# EAGLE board Proiect_TSC_PCB (EAGLE 9.7.0)
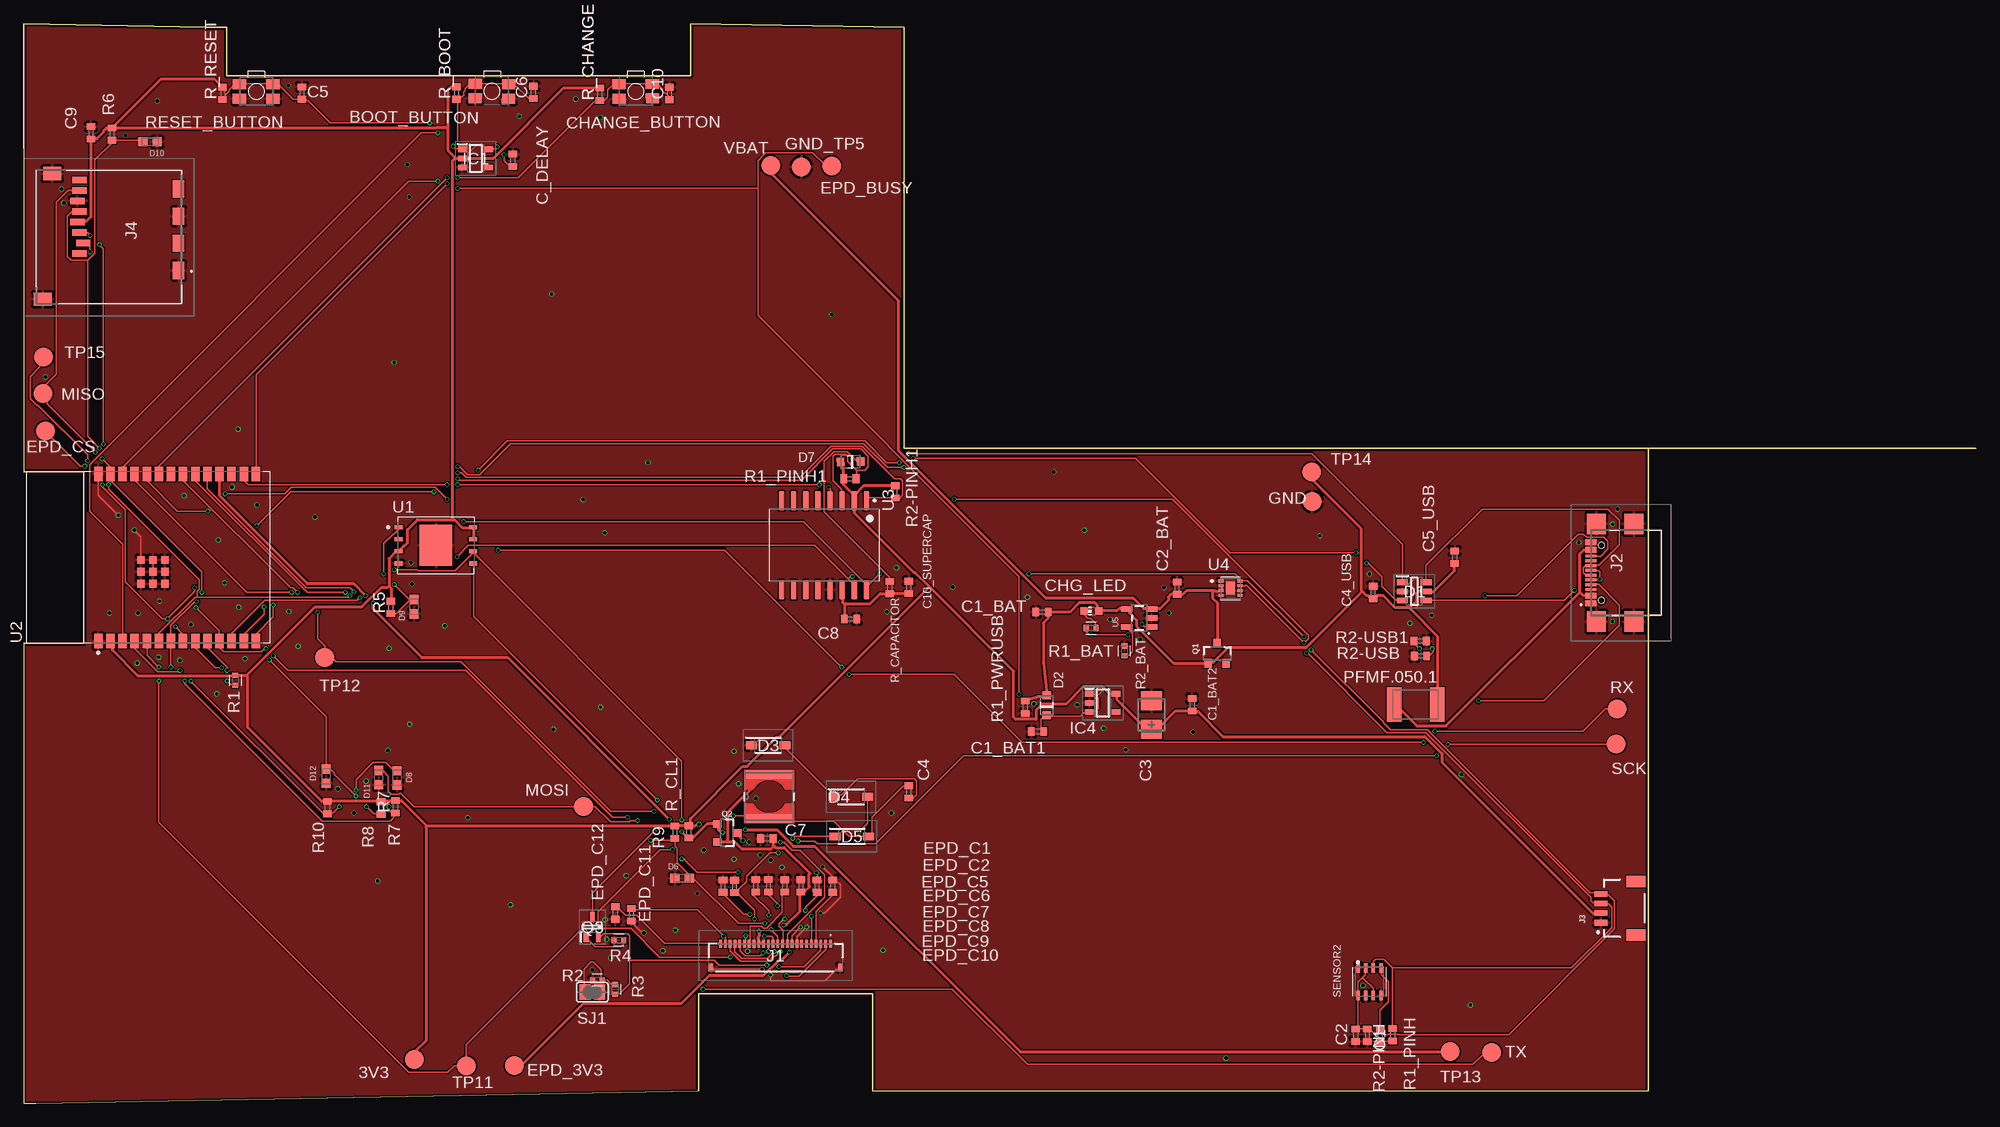
[diagram p0: board, top side]
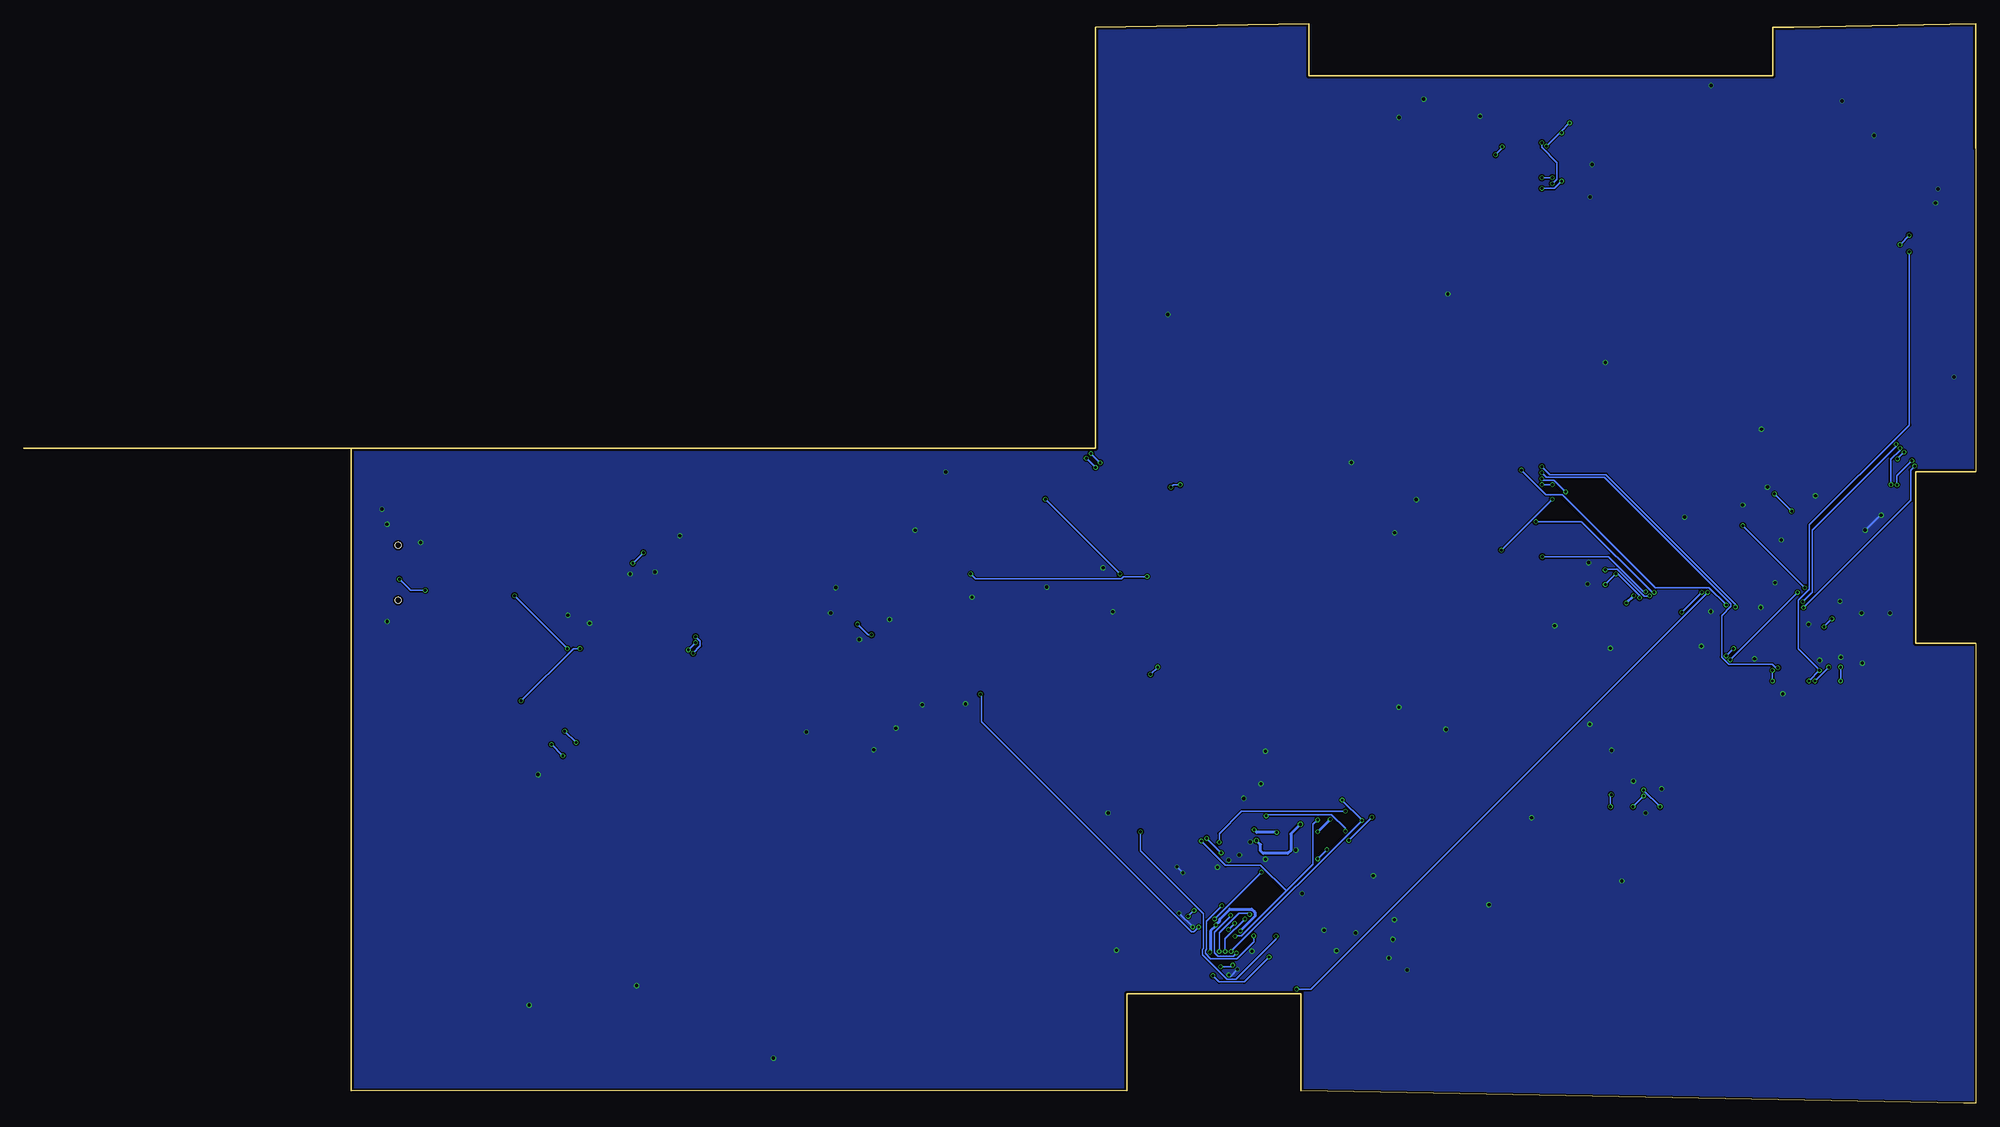
[diagram p1: board, bottom side, seen from below]

Size 204.47 x 113.03 mm. Coordinates in mm from the lower left corner, seen from the top.
Outline: 170.18,68.58 92.2,68.58 92.2,112.7 69.85,113.03 69.85,107.62 21.23,107.62 21.23,112.7 19.05,112.7 0,113.03 0,100 0,66.14 6.28,66.14 6.28,48.16 0,48.16 0,0 1.27,0 70.68,1.27 70.68,11.43 88.9,11.43 88.9,1.27 170.16,1.27 170.18,68.58
Outline: 170.18,68.58 204.47,68.58
Copper layers (1*16): Top 0.035mm / dielectric 1.6mm / Bottom 0.035mm
Design rules "jlcpcb-2layers.dru *": minimum track width 0.15mm, minimum drill 0.3mm, track to track 5mil, track to pad 5mil, pad to pad 5mil, via to via 5mil, smd to smd 5mil, copper to edge 0.2mm, drill to drill 6mil, minimum pad ring 10mil, minimum via ring 3mil, stop-mask expansion 4mil, vias tented up to drill 0mil, thermal gap 10mil
Net classes: 1 POWER: width 0.3 mm

## Footprints (pad centres in the part's own frame; a part is rotated, then mirrored left to right if it is on the bottom)
TP20R = smd 2 x 2: TP 0,0
MYBUTTON = smd 1.4 x 1.05: 1 1.75,0.75; 2 -1.75,0.75; 3 -1.75,-0.75; 4 1.75,-0.75
ESP32_WROVER_EAGLE-LTSPICE_C0402 = smd 0.7 x 0.9: 1 -0.65,0; 2 0.65,0
RCL_CT3528 = smd 2 x 2.2: + -1.5,0; - 1.5,0
EAGLE-LTSPICE_C0402 = smd 0.7 x 0.9: 1 -0.65,0; 2 0.65,0
ADAFRUIT_CHIP-LED0603 = smd 0.8 x 0.8: A 0,-0.75; C 0,0.75
SOT95P280X145-6N = smd 1.2 x 0.6: 1 -1.25,0.95; 2 -1.25,0; 3 -1.25,-0.95; 4 1.25,-0.95; 5 1.25,0; 6 1.25,0.95
ESP32_WROVER_AVX---SD0805S020S1R0_AVX_SD0805S020S1R0_0 = smd 0.8 x 0.9: 1 -1.05,0; 2 1.05,0
SOD3716X135N = smd 1.15 x 0.8: 1 -1.75,0; 2 1.75,0
DIOC1608X36N = smd 0.97 x 0.94: 1 -0.75,0; 2 0.75,0
SOT95P280X125-5N = smd 0.9 x 0.6: 1 -1.4,0.95; 2 -1.4,0; 3 -1.4,-0.95; 4 1.4,-0.95; 5 1.4,0.95
SOT95P280X120-5N = smd 0.9 x 0.6: 1 -1.4,0.95; 2 -1.4,0; 3 -1.4,-0.95; 4 1.4,-0.95; 5 1.4,0.95
FH34SRJ24S05SH99 = smd 0.3 x 0.8: 1 5.75,1.45; 2 5.25,1.45; 3 4.75,1.45; 4 4.25,1.45; 5 3.75,1.45; 6 3.25,1.45; 7 2.75,1.45; 8 2.25,1.45; 9 1.75,1.45; 10 1.25,1.45; 11 0.75,1.45; 12 0.25,1.45; 13 -0.25,1.45; 14 -0.75,1.45; 15 -1.25,1.45; 16 -1.75,1.45; 17 -2.25,1.45; 18 -2.75,1.45; 19 -3.25,1.45; 20 -3.75,1.45; 21 -4.25,1.45; 22 -4.75,1.45; 23 -5.25,1.45; 24 -5.75,1.45 | smd 0.4 x 0.8: MP1 6.75,-1.05; MP2 -6.75,-1.05
SAMACSYS_PARTS_USB4110GFA = smd 0.3 x 1.15: A1 -3.35,3.678; A4 -2.55,3.678; A5 -1.25,3.678; A6 -0.25,3.678; A7 0.25,3.678; A8 1.25,3.678; A9 2.55,3.678; A12 3.35,3.678; B1 3.05,3.678; B4 2.25,3.678; B5 1.75,3.678; B6 0.75,3.678; B7 -0.75,3.678; B8 -1.75,3.678; B9 -2.25,3.678; B12 -3.05,3.678 | smd 2.18 x 2: MP1 -5.11,-0.827; MP2 5.11,-0.827; MP3 -5.11,3.103; MP4 5.11,3.103 | hole 0.65: -2.89,2.603; 2.89,2.603
JST04_1MM_RA = smd 0.6 x 1.35: 1 -1.5,0; 2 -0.5,0; 3 0.5,0; 4 1.5,0 | smd 1.2 x 2: NC1 2.8,-3.675; NC2 -2.8,-3.675
112ATAARR03ATTEND = smd 1.8 x 1.2: G1 10.6,10.4; G2 4.9,10.4; S1 7.75,10.4; S2 2.05,10.4 | smd 1.4 x 1.9: G3 13.6,-3.85; G4 0.45,-2.85 | smd 0.7 x 1.5: P1 8.8,0; P2 7.7,0.4; P3 6.6,0; P4 5.5,-0.2; P5 4.4,0; P6 3.3,-0.2; P7 2.2,0; P8 1.1,0
IND_4828-WE-TPC_WRE = smd 0.889 x 4.826: 1 -2.286,0; 2 2.286,0
ESP32C6_VARISTOR_CT/CN1812 = smd 1.5 x 3.6: 1 -2.25,0; 2 2.25,0
ESP32_WROVER_SPARKFUN-DISCRETESEMI_SOT23-3 = smd 0.8 x 0.9: 1 -0.95,-1; 2 0.95,-1; 3 0,1.1
SOT65P210X110-3N = smd 1.05 x 0.5: 1 -1.05,0.65; 2 -1.05,-0.65; 3 1.05,0
RESC1005X40 = smd 0.535 x 0.644: 1 -0.507,0; 2 0.507,0
ESP32_WROVER_EAGLE-LTSPICE_R0402 = smd 0.7 x 0.9: 1 -0.65,0; 2 0.65,0
ESP32_WROVER_BME680_PSON80P300X300X100-8N = smd 1.016 x 0.5: 1 1.458,1.2; 2 1.458,0.4; 3 1.458,-0.4; 4 1.458,-1.2; 5 -1.458,-1.22; 6 -1.458,-0.4; 7 -1.458,0.4; 8 -1.458,1.2
SJ = smd 1.168 x 1.6: 1 -0.762,0; 2 0.762,0
SON127P600X800X80-9N = smd 0.94 x 0.44: 1 -3.895,1.905; 2 -3.895,0.635; 3 -3.895,-0.635; 4 -3.895,-1.905; 5 3.895,-1.905; 6 3.895,-0.635; 7 3.895,0.635; 8 3.895,1.905 | smd 3.4 x 4.3: 9 0,0
XCVR_ESP32-C6-WROOM-1-N8 = smd 1.5 x 0.9: 1 -8.75,5.26; 2 -8.75,3.99; 3 -8.75,2.72; 4 -8.75,1.45; 5 -8.75,0.18; 6 -8.75,-1.09; 7 -8.75,-2.36; 8 -8.75,-3.63; 9 -8.75,-4.9; 10 -8.75,-6.17; 11 -8.75,-7.44; 12 -8.75,-8.71; 13 -8.75,-9.98; 14 -8.75,-11.25; 15 8.75,-11.25; 16 8.75,-9.98; 17 8.75,-8.71; 18 8.75,-7.44; 19 8.75,-6.17; 20 8.75,-4.9; 21 8.75,-3.63; 22 8.75,-2.36; 23 8.75,-1.09; 24 8.75,0.18; 25 8.75,1.45; 26 8.75,2.72; 27 8.75,3.99; 28 8.75,5.26 | smd 0.8 x 0.8: 29_1 -2.755,0.79; 29_2 -1.505,0.79; 29_3 -0.255,0.79; 29_4 -2.755,-0.46; 29_5 -1.505,-0.46; 29_6 -0.255,-0.46; 29_7 -2.755,-1.71; 29_8 -1.505,-1.71; 29_9 -0.255,-1.71
SOIC127P1032X265-16N = smd 2.05 x 0.59: 1 -4.655,4.445; 2 -4.655,3.175; 3 -4.655,1.905; 4 -4.655,0.635; 5 -4.655,-0.635; 6 -4.655,-1.905; 7 -4.655,-3.175; 8 -4.655,-4.445; 9 4.655,-4.445; 10 4.655,-3.175; 11 4.655,-1.905; 12 4.655,-0.635; 13 4.655,0.635; 14 4.655,1.905; 15 4.655,3.175; 16 4.655,4.445
SON50P200X200X80-9N = smd 0.61 x 0.305: 1 -0.985,0.75; 2 -0.985,0.25; 3 -0.985,-0.25; 4 -0.985,-0.75; 5 0.985,-0.75; 6 0.985,-0.25; 7 0.985,0.25; 8 0.985,0.75 | smd 0.9 x 1.3: 9 0,0
ESP32_WROVER_SPARKFUN-IC-POWER_SOT23-5 = smd 0.55 x 1.2: 1 -0.95,-1.3; 2 0,-1.3; 3 0.95,-1.3; 4 0.95,1.3; 5 -0.95,1.3

## Placement (x,y rotation side)
3V3  TPTP20R  [TP20R]  40.89,4.58 0 top
BOOT_BUTTON  BUTTON_CUSYOMV1  [MYBUTTON]  49.04,105.97 179.5 top
C1  100nF  [ESP32_WROVER_EAGLE-LTSPICE_C0402]  140.74,7.11 270 top
C1_BAT  4.7uF  [ESP32_WROVER_EAGLE-LTSPICE_C0402]  106.67,51.41 180 top
C1_BAT1  4.7uF  [ESP32_WROVER_EAGLE-LTSPICE_C0402]  106.19,38.91 180 top
C1_BAT2  4.7uF  [ESP32_WROVER_EAGLE-LTSPICE_C0402]  122.39,41.72 90 top
C2  100nF  [ESP32_WROVER_EAGLE-LTSPICE_C0402]  139.52,7.09 270 top
C2_BAT  4.7uF  [ESP32_WROVER_EAGLE-LTSPICE_C0402]  120.81,53.94 90 top
C3  100uF TANT  [RCL_CT3528]  118.11,40.64 90 top
C4  4.7uF/25V  [ESP32_WROVER_EAGLE-LTSPICE_C0402]  92.7,32.59 90 top
C4_USB  100nF  [ESP32_WROVER_EAGLE-LTSPICE_C0402]  141.34,53.48 90 top
C5  1uF  [EAGLE-LTSPICE_C0402]  29.13,105.78 90 top
C5_USB  4.7uF  [ESP32_WROVER_EAGLE-LTSPICE_C0402]  149.89,57.18 90 top
C6  100nF  [ESP32_WROVER_EAGLE-LTSPICE_C0402]  53.39,105.86 90 top
C7  10uF  [ESP32_WROVER_EAGLE-LTSPICE_C0402]  77.84,27.7 180 top
C8  100nF  [EAGLE-LTSPICE_C0402]  86.6,50.68 0 top
C9  100nF  [ESP32_WROVER_EAGLE-LTSPICE_C0402]  7.03,101.62 90 top
C10  100nF  [ESP32_WROVER_EAGLE-LTSPICE_C0402]  67.64,105.74 90 top
C10_SUPERCAP  CPH3225A  [EAGLE-LTSPICE_C0402]  92.71,54.01 90 top
C_DELAY  100nF  [ESP32_WROVER_EAGLE-LTSPICE_C0402]  51.23,98.74 90 top
CHANGE_BUTTON  BUTTON_CUSYOMV1  [MYBUTTON]  64.11,105.97 180.4 top
CHG_LED  [ADAFRUIT_CHIP-LED0603]  111.84,51.52 90 top
D1  USBLC6-2SC6Y  [SOT95P280X145-6N]  145.67,53.59 0 top
D2  ESP32_WROVER_AVX---SD0805S020S1R0_AVX_SD0805S020S1R0_0_0AVX_SD0805S020S1R0_0_0  [ESP32_WROVER_AVX---SD0805S020S1R0_AVX_SD0805S020S1R0_0]  107.16,41.66 90 top
D3  MBR0530  [SOD3716X135N]  77.97,37.48 0 top
D4  MBR0530  [SOD3716X135N]  86.65,32.09 0 top
D5  MBR0530  [SOD3716X135N]  86.74,27.93 0 top
D6  PGB1010603MR  [DIOC1608X36N]  68.95,23.53 0 top
D7  ESP32_WROVER_AVX---SD0805S020S1R0_AVX_SD0805S020S1R0_0_0AVX_SD0805S020S1R0_0_0  [ESP32_WROVER_AVX---SD0805S020S1R0_AVX_SD0805S020S1R0_0]  86.61,67.16 181.4 top
D8  PGB1010603MR  [DIOC1608X36N]  39.12,34.06 90 top
D9  PGB1010603MR  [DIOC1608X36N]  40.86,51.98 90 top
D10  PGB1010603MR  [DIOC1608X36N]  13.22,100.68 180 top
D11  PGB1010603MR  [DIOC1608X36N]  37.19,34.08 90 top
D12  PGB1010603MR  [DIOC1608X36N]  31.68,34.25 90 top
EPD_3V3  TPTP20R  [TP20R]  51.38,3.93 0 top
EPD_BUSY  TPTP20R  [TP20R]  84.63,98.14 0 top
EPD_C1  1uF/50V  [ESP32_WROVER_EAGLE-LTSPICE_C0402]  84.73,22.72 270 top
EPD_C2  1uF/50V  [ESP32_WROVER_EAGLE-LTSPICE_C0402]  83.09,22.73 270.4 top
EPD_C5  0.1uF/50V  [ESP32_WROVER_EAGLE-LTSPICE_C0402]  81.41,22.74 270 top
EPD_C6  1uF/50V  [ESP32_WROVER_EAGLE-LTSPICE_C0402]  79.71,22.75 270 top
EPD_C7  1uF/50V  [ESP32_WROVER_EAGLE-LTSPICE_C0402]  78.01,22.77 270 top
EPD_C8  1uF/50V  [ESP32_WROVER_EAGLE-LTSPICE_C0402]  76.67,22.77 270 top
EPD_C9  1uF/50V  [ESP32_WROVER_EAGLE-LTSPICE_C0402]  74.45,22.69 270 top
EPD_C10  1uF/50V  [ESP32_WROVER_EAGLE-LTSPICE_C0402]  73.25,22.72 270 top
EPD_C11  1uF/50V  [ESP32_WROVER_EAGLE-LTSPICE_C0402]  63.66,19.73 90 top
EPD_C12  1uF/50F  [ESP32_WROVER_EAGLE-LTSPICE_C0402]  61.95,19.91 90 top
EPD_CS  TPTP20R  [TP20R]  2.25,70.41 0 top
GND  TPTP20R  [TP20R]  134.94,63 0 top
GND_TP5  TPTP20R  [TP20R]  81.47,98.06 0 top
IC1  BD5229G-TR  [SOT95P280X125-5N]  47.34,98.94 0 top
IC4  XC6220A331MR-G  [SOT95P280X120-5N]  113.03,41.91 0 top
J1  FH34SRJ-24S-0.5SH_99_  [FH34SRJ24S05SH99]  78.74,15.24 0 top
J2  SAMACSYS_PARTS_USB4110-GF-A  [SAMACSYS_PARTS_USB4110GFA]  167.85,55.54 90 top
J3  QWIIC_RIGHT_ANGLE  [JST04_1MM_RA]  165.21,20.4 90 top
J4  112A-TAAR-R03_ATTEND  [112ATAARR03ATTEND]  5.82,97.79 270 top
L1  68uH  [IND_4828-WE-TPC_WRE]  78.08,32.1 90 top
MISO  TPTP20R  [TP20R]  2.02,74.32 0 top
MOSI  TPTP20R  [TP20R]  58.64,31.05 0 top
PFMF.050.1  ESP32C6_VARISTORCN1812  [ESP32C6_VARISTOR_CT/CN1812]  145.8,41.73 0 top
Q1  20V/4.2A/52mΩ/1.4W  [ESP32_WROVER_SPARKFUN-DISCRETESEMI_SOT23-3]  125.02,47.06 0 top
Q2  20V/4.2A/52mΩ/1.4W  [ESP32_WROVER_SPARKFUN-DISCRETESEMI_SOT23-3]  73.65,28.3 270 top
Q3  SI1308EDL-T1-GE3  [SOT65P210X110-3N]  59.54,18.44 90 top
R1  100K  [RESC1005X40]  22.15,44.28 90 top
R1_BAT  200  [RESC1005X40]  111.81,49.76 180 top
R1_PINH  10K  [ESP32_WROVER_EAGLE-LTSPICE_R0402]  143.38,7.15 270 top
R1_PINH1  10K  [ESP32_WROVER_EAGLE-LTSPICE_R0402]  86.53,65.39 180 top
R1_PWRUSB  100K  [ESP32_WROVER_EAGLE-LTSPICE_R0402]  104.89,41.46 90 top
R2  2.2  [RESC1005X40]  60.07,12.87 0 top
R2-PINH  10K  [ESP32_WROVER_EAGLE-LTSPICE_R0402]  142.09,7.11 270 top
R2-PINH1  10K  [ESP32_WROVER_EAGLE-LTSPICE_R0402]  91.28,64.01 90 top
R2-USB  5K1  [ESP32_WROVER_EAGLE-LTSPICE_R0402]  146.32,46.82 180 top
R2-USB1  5K1  [ESP32_WROVER_EAGLE-LTSPICE_R0402]  146.27,48.39 180 top
R2_BAT  2K  [RESC1005X40]  115.32,47.36 270 top
R3  0.47  [RESC1005X40]  61.94,11.91 269.4 top
R4  100k  [RESC1005X40]  62.32,17.06 0 top
R5  10K  [ESP32_WROVER_EAGLE-LTSPICE_R0402]  38.46,51.91 90 top
R6  10K  [ESP32_WROVER_EAGLE-LTSPICE_R0402]  9.23,101.49 90 top
R7  10K  [ESP32_WROVER_EAGLE-LTSPICE_R0402]  38.94,31.05 90 top
R8  10K  [ESP32_WROVER_EAGLE-LTSPICE_R0402]  37.43,30.9 90 top
R9  10K  [ESP32_WROVER_EAGLE-LTSPICE_R0402]  68.21,28.37 90 top
R10  10K  [ESP32_WROVER_EAGLE-LTSPICE_R0402]  31.81,30.95 90 top
R_BOOT  10K  [ESP32_WROVER_EAGLE-LTSPICE_R0402]  45.33,105.79 90 top
R_CAPACITOR  15  [ESP32_WROVER_EAGLE-LTSPICE_R0402]  90.72,53.99 270 top
R_CHANGE  10K  [ESP32_WROVER_EAGLE-LTSPICE_R0402]  60.34,105.65 90 top
R_CL1  10K  [ESP32_WROVER_EAGLE-LTSPICE_R0402]  69.67,28.4 90 top
R_RESET  10K  [ESP32_WROVER_EAGLE-LTSPICE_R0402]  20.82,105.75 90 top
RESET_BUTTON  BUTTON_CUSYOMV1  [MYBUTTON]  24.34,105.94 180 top
RX  TPTP20R  [TP20R]  166.92,41.29 0 top
SCK  TPTP20R  [TP20R]  166.81,37.58 0 top
SENSOR2  ESP32_WROVER_BME680_BME680  [ESP32_WROVER_BME680_PSON80P300X300X100-8N]  140.97,12.7 90 top
SJ1  [SJ]  59.54,11.62 180 top
TP11  TPTP20R  [TP20R]  46.36,3.9 0 top
TP12  TPTP20R  [TP20R]  31.51,46.67 0 top
TP13  TPTP20R  [TP20R]  149.44,5.4 0 top
TP14  TPTP20R  [TP20R]  134.9,66.1 0 top
TP15  TPTP20R  [TP20R]  2.06,78.12 0 top
TX  TPTP20R  [TP20R]  153.77,5.31 0 top
U1  W25Q512JVEIQ  [SON127P600X800X80-9N]  43.18,58.42 0 top
U2  ESP32-C6-WROOM-1-N8  [XCVR_ESP32-C6-WROOM-1-N8]  13.06,57.15 90 top
U3  DS3231SN#  [SOIC127P1032X265-16N]  83.82,58.42 270 top
U4  MAX17048G+T10  [SON50P200X200X80-9N]  126.41,53.93 0 top
U5  ESP32_WROVER_SPARKFUN-IC-POWER_MCP73831  [ESP32_WROVER_SPARKFUN-IC-POWER_SOT23-5]  116.84,50.8 90 top
VBAT  TPTP20R  [TP20R]  78.25,98.18 0 top

## Library data of the parts
3V3 BOOT_BUTTON CHANGE_BUTTON CHG_LED EPD_3V3 EPD_BUSY EPD_CS GND GND_TP5 MISO MOSI PFMF.050.1 RESET_BUTTON RX SCK SJ1 TP11-TP15 TX VBAT = DeskAssistant v19 v1
C1 C1_BAT C1_BAT1 C1_BAT2 C2 C2_BAT C4 C4_USB C5 C5_USB C6-C10 C10_SUPERCAP C_DELAY EPD_C1 EPD_C2 EPD_C5-EPD_C12 = DeskAssistant v19 v1; SPICEMODEL: NONE; SPICEPREFIX: C
C3 = DeskAssistant v19 v1; SPICEPREFIX: C
D1 = DeskAssistant v19 v1; AVAILABILITY: In Stock; CHECK_PRICES: https://www.snapeda.com/parts/USBLC6-2SC6Y/STMicroelectronics/view-part/?ref=eda; DESCRIPTION: 17V Clamp 5A (8/20µs) Ipp Tvs Diode Surface Mount SOT-23-6; MF: STMicroelectronics; MP: USBLC6-2SC6Y; PACKAGE: SOT-23-6 STMicroelectronics; PRICE: None; SNAPEDA_LINK: https://www.snapeda.com/parts/USBLC6-2SC6Y/STMicroelectronics/view-part/?ref=snap
D2 D7 = DeskAssistant v19 v1; CENTROID_NOT_SPECIFIED: No; DATASHEET: http://datasheets.avx.com/schottky.pdf; DIGIKEY_DESCRIPTION: DIODE SCHOTTKY 20V 1A 0805; DIGIKEY_PART_NUMBER: 478-7800-1-ND; LEAD_FREE: yes; MF: AVX; MOUSER_PART_NUMBER: 581-SD0805S020S1R0; PACKAGE: 0805 (2012 metric); PREFIX: D; ROHS: yes; TEMPERATURE_RANGE_HIGH: +125°C; TEMPERATURE_RANGE_LOW: -55°C
D3-D5 = DeskAssistant v19 v1; AVAILABILITY: In Stock; CHECK_PRICES: https://www.snapeda.com/parts/MBR0530/Onsemi/view-part/?ref=eda; DESCRIPTION: Diode Schottky 30 V 500mA Surface Mount SOD-123; MF: ON Semiconductor; MP: MBR0530; PACKAGE: SOD-123-2 ON Semiconductor; PRICE: None; PURCHASE-URL: https://www.snapeda.com/api/url_track_click_mouser/?unipart_id=179458&manufacturer=ON Semiconductor&part_name=MBR0530&search_term=None; SNAPEDA_LINK: https://www.snapeda.com/parts/MBR0530/Onsemi/view-part/?ref=snap
D6 D8-D12 = DeskAssistant v19 v1; AVAILABILITY: In Stock; CHECK_PRICES: https://www.snapeda.com/parts/PGB1010603MR/Littelfuse/view-part/?ref=eda; DESCRIPTION: 150V (Typ) Clamp - Ipp Tvs Diode Surface Mount 0603 (1608 Metric); MF: Littelfuse Inc.; MP: PGB1010603MR; PACKAGE: 0603 Littelfuse Inc.; PRICE: None; PURCHASE-URL: https://www.snapeda.com/api/url_track_click_mouser/?unipart_id=5659453&manufacturer=Littelfuse Inc.&part_name=PGB1010603MR&search_term=None; SNAPEDA_LINK: https://www.snapeda.com/parts/PGB1010603MR/Littelfuse/view-part/?ref=snap
IC1 = DeskAssistant v19 v1; DESCRIPTION: Voltage Detector with Adjustable Delay Time: CMOS processes are utilized to develop high precision, low current consumption CMOS reset ICs that allow arbitrary setting of the delay time. The extensive lineup includes both Nch Open Drain and CMOS output types in a wide range of detection voltages (from 2.3V to 6.0V, in 0.1V steps), enabling selection of the ideal solution based on customer requirements. In addition, the entire series is of course both lead-free and RoHS-compliant.; HEIGHT: 1.25mm; MANUFACTURER_NAME: ROHM Semiconductor; MANUFACTURER_PART_NUMBER: BD5229G-TR; MOUSER_PART_NUMBER: 755-BD5229G-TR; MOUSER_PRICE-STOCK: https://www.mouser.co.uk/ProductDetail/ROHM-Semiconductor/BD5229G-TR?qs=4kLU8WoGk0vvnhrrYwdszw%3D%3D
IC4 = DeskAssistant v19 v1; DESCRIPTION: LDO Voltage Regulators; HEIGHT: 1.2mm; MANUFACTURER_NAME: Torex; MANUFACTURER_PART_NUMBER: XC6220A331MR-G; MOUSER_PART_NUMBER: 865-XC6220A331MR-G; MOUSER_PRICE-STOCK: https://www.mouser.co.uk/ProductDetail/Torex-Semiconductor/XC6220A331MR-G?qs=AsjdqWjXhJ8ZSWznL1J0gg%3D%3D
J1 = DeskAssistant v19 v1; DESCRIPTION: 24 Position FFC, FPC Connector Contacts, Top and Bottom 0.020" (0.50mm) Surface Mount, Right Angle; HEIGHT: 1.1mm; MANUFACTURER_NAME: Hirose; MANUFACTURER_PART_NUMBER: FH34SRJ-24S-0.5SH(99); MOUSER_PART_NUMBER: 798-FH34SRJ24S05SH99; MOUSER_PRICE-STOCK: https://www.mouser.co.uk/ProductDetail/Hirose-Connector/FH34SRJ-24S-0.5SH99?qs=vcbW%252B4%252BSTIpKBl5ap9J8Fw%3D%3D
J2 = DeskAssistant v19 v1; DESCRIPTION: CONN USB 2.0 TYPE-C R/A SMT; HEIGHT: 3.26mm; MANUFACTURER_NAME: GCT (GLOBAL CONNECTOR TECHNOLOGY); MANUFACTURER_PART_NUMBER: USB4110-GF-A; MOUSER_PART_NUMBER: 640-USB4110-GF-A; MOUSER_PRICE-STOCK: https://www.mouser.co.uk/ProductDetail/GCT/USB4110-GF-A?qs=KUoIvG%2F9IlYiZvIXQjyJeA%3D%3D
J3 = DeskAssistant v19 v1; PROD_ID: CONN-13694
J4 = DeskAssistant v19 v1; DESCRIPTION: Micro SD Card Socket, Push-Push Type, Top Mount, SMT, H=1.83mm, 10u; HEIGHT: 1.9mm; MANUFACTURER_NAME: ATTEND; MANUFACTURER_PART_NUMBER: 112A-TAAR-R03 ATTEND
L1 = DeskAssistant v19 v1; COPYRIGHT: Copyright (C) 2024 Ultra Librarian. All rights reserved.; MANUFACTURER_PART_NUMBER: 744043680; MFR_NAME: Wurth Electronics
Q1 Q2 = DeskAssistant v19 v1; PROD_ID: TRAN-14388
Q3 = DeskAssistant v19 v1; AVAILABILITY: In Stock; CHECK_PRICES: https://www.snapeda.com/parts/SI1308EDL-T1-GE3/Vishay+Siliconix/view-part/?ref=eda; DESCRIPTION: Si1308EDL-T1-GE3 N-channel MOSFET Transistor, 1.5 A, 30 V, 3-Pin SC-70 | Siliconix / Vishay SI1308EDL-T1-GE3; MF: Vishay Siliconix; MP: SI1308EDL-T1-GE3; PACKAGE: SOT-323 Vishay Semiconductor; PRICE: None; PURCHASE-URL: https://www.snapeda.com/api/url_track_click_mouser/?unipart_id=274603&manufacturer=Vishay Siliconix&part_name=SI1308EDL-T1-GE3&search_term=None; SNAPEDA_LINK: https://www.snapeda.com/parts/SI1308EDL-T1-GE3/Vishay+Siliconix/view-part/?ref=snap
R1 R1_BAT R2 R2_BAT R3 R4 = Resistor; CATEGORY: Resistors; DESCRIPTION: Chip Resistor 1.05 X 0.54 X 0.40 mm body 0402(1005-METRIC) Package; PACKAGE_SIZE: 0402; PACKAGE_TYPE: SMD
R1_PINH R1_PINH1 R1_PWRUSB R2-PINH R2-PINH1 R2-USB R2-USB1 R5-R10 R_BOOT R_CAPACITOR R_CHANGE R_CL1 R_RESET = DeskAssistant v19 v1; SPICEMODEL: NONE; SPICEPREFIX: R
SENSOR2 = DeskAssistant v19 v1; AVAILABILITY: Unavailable; DESCRIPTION: Integrated Environmental Unit; MF: Bosch Sensortec; MP: BME680; PACKAGE: LGA-8 Bosch Tools; PRICE: None
U1 = DeskAssistant v19 v1; AVAILABILITY: In Stock; CHECK_PRICES: https://www.snapeda.com/parts/W25Q512JVEIQ/Winbond+Electronics/view-part/?ref=eda; DESCRIPTION: FLASH - NOR Memory IC 512Mb (64M x 8) SPI - Quad I/O 133 MHz 8-WSON (8x6); MF: Winbond Electronics; MP: W25Q512JVEIQ; PACKAGE: Package; PRICE: None; SNAPEDA_LINK: https://www.snapeda.com/parts/W25Q512JVEIQ/Winbond+Electronics/view-part/?ref=snap
U2 = DeskAssistant v19 v1; AVAILABILITY: In Stock; CHECK_PRICES: https://www.snapeda.com/parts/ESP32-C6-WROOM-1-N8/Espressif+Systems/view-part/?ref=eda; DESCRIPTION: Multiprotocol Modules ESP32-C6 module, Wi-Fi 6 in 2.4 GHz band, Bluetooth 5, Zigbee 3.0 and Thread. ESP34-WROOM Compatible - ENGINEERING SAMPLE; MF: Espressif Systems; MP: ESP32-C6-WROOM-1-N8; PACKAGE: None; PRICE: None; SNAPEDA_LINK: https://www.snapeda.com/parts/ESP32-C6-WROOM-1-N8/Espressif+Systems/view-part/?ref=snap
U3 = DeskAssistant v19 v1; AVAILABILITY: In Stock; CHECK_PRICES: https://www.snapeda.com/parts/DS3231SN%23/Analog+Devices/view-part/?ref=eda; DESCRIPTION: Extremely Accurate I²C-Integrated RTC/TCXO/Crystal; MF: Analog Devices; MP: DS3231SN#; PACKAGE: SOIC-16 Maxim; PRICE: None; PURCHASE-URL: https://www.snapeda.com/api/url_track_click_mouser/?unipart_id=99048&manufacturer=Analog Devices&part_name=DS3231SN#&search_term=None; SNAPEDA_LINK: https://www.snapeda.com/parts/DS3231SN%23/Analog+Devices/view-part/?ref=snap
U4 = DeskAssistant v19 v1; AVAILABILITY: In Stock; CHECK_PRICES: https://www.snapeda.com/parts/MAX17048G+T10/Analog+Devices/view-part/?ref=eda; DESCRIPTION: 3µA 1-Cell/2-Cell Fuel Gauge with ModelGauge; MF: Analog Devices; MP: MAX17048G+T10; PACKAGE: TDFN-8 Maxim; PRICE: None; PURCHASE-URL: https://www.snapeda.com/api/url_track_click_mouser/?unipart_id=329239&manufacturer=Analog Devices&part_name=MAX17048G+T10&search_term=None; SNAPEDA_LINK: https://www.snapeda.com/parts/MAX17048G+T10/Analog+Devices/view-part/?ref=snap
U5 = DeskAssistant v19 v1; PROD_ID: IC-09995

## Nets
3V3 [POWER]: 3V3.TP C1_BAT2.1 C3.+ C9.1 D7.2 IC1.2 IC4.5 J3.2 J4.P4 Q2.3 R1.2 R1_PINH1.2 R2-PINH1.2 R5.2 R6.2 R7.2 R8.2 R9.2 R10.2 R_BOOT.2 R_CHANGE.2 R_CL1.2 R_RESET.2 U1.3 U1.7 U1.8 U2.2 U3.2
12C_PW: C1.1 C2.1 R1_PINH.2 R2-PINH.2 SENSOR2.2 SENSOR2.6 SENSOR2.8
32KHZ: R2-PINH1.1 U2.9 U3.1
DN: D1.4 J2.A7 J2.B7
DP: D1.6 J2.A6 J2.B6
EPD_3V3 [POWER]: C7.1 EPD_3V3.TP EPD_C5.2 J1.15 J1.16 L1.2 Q2.2
EPD_3V3_C [POWER]: Q2.1 R_CL1.1 TP13.TP U2.18
EPD_BUSY: EPD_BUSY.TP J1.9 U2.26
EPD_CS: D6.2 EPD_CS.TP J1.12 R9.1 U2.11
EPD_DC: J1.11 TP11.TP U2.5
EPD_RST: J1.10 TP12.TP U2.21
FLASH_CS: D9.2 R5.1 U1.1 U2.12
GDR: J1.2 Q3.1 R4.2
GND: BOOT_BUTTON.1 BOOT_BUTTON.2 C1.2 C1_BAT1.2 C1_BAT2.2 C1_BAT.2 C2.2 C2_BAT.2 C3.- C4_USB.2 C5.2 C5_USB.2 C6.2 C7.2 C8.2 C9.2 C10.2 C10_SUPERCAP.2 C_DELAY.2 CHANGE_BUTTON.1 CHANGE_BUTTON.2 D1.2 D3.1 D6.1 D8.1 D9.1 D10.1 D11.1 D12.1 EPD_C1.1 EPD_C2.1 EPD_C5.1 EPD_C6.1 EPD_C7.1 EPD_C8.1 EPD_C9.1 EPD_C10.1 EPD_C11.1 EPD_C12.1 GND.TP GND_TP5.TP IC1.3 IC4.2 J1.8 J1.17 J1.MP1 J1.MP2 J2.A1 J2.A12 J2.B1 J2.B12 J2.MP1 J2.MP2 J2.MP3 J2.MP4 J3.1 J4.G1 J4.G2 J4.G3 J4.G4 J4.P6 R1_PWRUSB.1 R2-USB1.1 R2-USB.2 R2.1 R2_BAT.1 R4.1 RESET_BUTTON.1 RESET_BUTTON.2 SENSOR2.1 SENSOR2.5 SENSOR2.7 SJ1.1 U1.4 U1.9 U2.1 U2.28 U2.29_1 U2.29_2 U2.29_3 U2.29_4 U2.29_5 U2.29_6 U2.29_7 U2.29_8 U2.29_9 U3.13 U4.1 U4.4 U4.6 U4.9 U5.2
GPIOB: R1.1 U2.10
I2C_PW: U2.17
INT_RTC: R1_PINH1.1 TP15.TP U2.8 U3.3
IO/BOOT: BOOT_BUTTON.3 BOOT_BUTTON.4 C6.1 R_BOOT.1 U2.15
IO/CHANGE: C10.1 CHANGE_BUTTON.3 CHANGE_BUTTON.4 R_CHANGE.1 U2.23
MISO: D12.2 J4.P7 MISO.TP R8.1 U2.27
MOSI: D11.2 J1.14 J4.P3 MOSI.TP R7.1 U1.5 U2.7
N$1: J2.B5 R2-USB.1
N$2: J2.A5 R2-USB1.2
N$3: C1_BAT1.1 D2.1 IC4.1 IC4.3
N$4: R1_BAT.2 U5.1
N$5: U1.2
N$6: R2_BAT.2 U5.5
N$7: C4.1 D3.2 D4.1
N$9: CHG_LED.C R1_BAT.1
N$11: EPD_C1.2 J1.4
N$12: EPD_C2.2 J1.5
N$14: EPD_C6.2 J1.18
N$15: EPD_C7.2 J1.19
N$16: C_DELAY.1 IC1.5
N$17: EPD_C8.2 J1.20
N$19: EPD_C10.2 J1.22
N$21: EPD_C12.2 J1.24
N$22: D7.1 R_CAPACITOR.1
PREVGH: D5.1 EPD_C9.2 J1.21
PREVGL: D4.2 EPD_C11.2 J1.23
RESE: J1.3 Q3.2 R3.2
RESE': R2.2 R3.1 SJ1.2
RESET: C5.1 IC1.1 R_RESET.1 RESET_BUTTON.3 RESET_BUTTON.4 U2.3
RTC_RST: U2.16 U3.4
RX: RX.TP U2.24
SCK: D10.2 J1.13 J4.P5 R6.1 SCK.TP U1.6 U2.6
SCL: J3.4 R2-PINH.1 SENSOR2.4 U2.20 U3.16 U4.7
SDA: J3.3 R1_PINH.1 SENSOR2.3 U2.19 U3.15 U4.8
SRC: C4.2 D5.2 L1.1 Q3.3
SS_SD: D8.2 J4.P2 R10.1 U2.4
TX: TX.TP U2.25
USB_D+: D1.1 U2.14
USB_D-: D1.3 U2.13
VBAT [POWER]: C2_BAT.1 Q1.3 U4.2 U4.3 U5.3 VBAT.TP
VBUS [POWER]: C1_BAT.1 C4_USB.1 C5_USB.1 CHG_LED.A D1.5 D2.2 PFMF.050.1.2 Q1.1 R1_PWRUSB.2 TP14.TP U5.4
VRTC [POWER]: C8.1 C10_SUPERCAP.1 R_CAPACITOR.2 U3.14
VUSB [POWER]: J2.A4 J2.A9 J2.B4 J2.B9 PFMF.050.1.1

## Tracks (layer width: path | path; a pad name or v marks a point on that pad's centre or on a via)
3V3  (via drill 0.35)
  Top 0.3: D7.2 85.62,67.13 85.69,67.06 85.69,66.5 85.82,66.36 85.82,65.4 R1_PINH1.2 85.89,65.26 85.89,64.77 86.93,63.73 U3.2 | R2-PINH1.2 91.23,64.7 88.04,64.7 87,63.66 87,63.11 U3.2 | J3.2 165.19,19.9 164.35,19.9 148.56,35.69 148.56,36.59 146.76,38.39 125.64,38.39 123.01,41.02 122.53,41.02 C1_BAT2.1 122.39,41.09 120.66,41.09 118.79,39.22 118.23,39.22 C3.+ 118.09,39.15 117.61,39.15 114.49,42.27 114.49,42.82 IC4.5 114.29,42.82 113.8,42.82 113.04,43.58 110.96,43.58 109.16,41.78 106.67,41.78 106.04,41.15 106.04,40.19 103.9,40.19 103.69,40.4 103.69,45.24 94.86,54.07 | 94.86,54.07 93.37,55.56 93.23,55.56 87,61.8 87,62.97 U3.2 | R6.2 9.23,102.1 8.61,102.1 8.33,101.82 8.33,101.68 7.64,100.99 7.09,100.99 C9.1 7.02,100.85 7.02,92.82 6.53,92.33 5.63,92.33 J4.P4 | 45.24,98.98 45.87,98.98 IC1.2 46.08,98.98 49.19,98.98 56.53,106.32 60.27,106.32 R_CHANGE.2 | 45.24,98.98 44.41,99.81 44.41,102.17 | 44.41,102.17 44.41,106.11 44.69,106.39 45.31,106.39 R_BOOT.2 | 44.41,102.17 43.17,102.17 43.1,102.1 9.37,102.1 R6.2 | U1.7 47.11,59.09 47.11,60.27 U1.8 46.98,60.27 45.94,60.27 45.11,61.1 44.9,61.1 | 38.25,54.11 38.46,53.9 38.46,52.58 R5.2 | 38.25,54.11 38.25,57.02 39.01,57.78 39.22,57.78 U1.3 39.36,57.92 39.77,58.33 39.84,58.33 40.19,58.68 40.19,60.06 41.23,61.1 44.9,61.1 | U2.2 9.1,48.36 9.23,48.22 9.23,47.46 11.93,44.76 22.11,44.76 R1.2 22.25,44.83 23.36,44.83 | 23.36,44.83 30.49,51.96 35.41,51.96 37.49,54.04 38.11,54.04 38.25,54.11 | R_CL1.2 69.62,29.04 68.23,29.04 R9.2 68.1,29.04 42.2,29.04 | 42.2,29.04 39.57,31.67 39.08,31.67 R7.2 38.87,31.67 37.56,31.67 R8.2 37.42,31.6 31.88,31.6 R10.2 31.67,31.6 31.19,31.6 23.43,39.36 23.43,44.69 23.36,44.83
  Top 0.3: 3V3.TP 40.95,4.59 40.95,5.36 42.13,6.53 42.13,28.9 42.2,29.04 | 44.9,61.1 44.9,98.7 45.11,98.91 45.24,98.98 | 94.86,54.07 79.11,38.32 78.83,38.32 75.78,35.27 75.3,35.27 69.83,29.8 69.83,29.32 69.69,29.18 R_CL1.2 | R6.2 14.34,107.24 19.98,107.24 R_RESET.2 | R_CL1.2 70.36,29.05 70.5,29.19 v70.74,29.19 | v75.35,27.51 74.75,28.11 Q2.3
  Bottom 0.3: v70.74,29.19 71.75,28.18 71.75,26.47 72.08,26.14 74.64,26.14 74.91,26.41 74.91,27.07 v75.35,27.51
12C_PW
  Top 0.15: 140.22,13.15 140.53,13.46 140.53,14.15 SENSOR2.2 | 140.22,13.15 139.77,12.7 SENSOR2.8 139.77,7.85 C2.1 139.56,7.78 140.74,7.78 C1.1 140.81,7.71 141.02,7.71 141.57,7.16 141.64,7.16 142.26,6.53 R2-PINH.2 142.12,6.46 143.37,6.46 R1_PINH.2 | 140.22,13.15 141.36,12 SENSOR2.6
32KHZ  (via drill 0.3)
  Top 0.15: U3.1 88.25,63.11 88.52,63.39 91.23,63.39 R2-PINH1.1 91.3,63.32 91.71,63.32 92.06,63.66 92.06,65.19 91.85,65.4 91.23,65.4 87.83,68.79 84.58,68.79 81.32,65.53 46.35,65.53 45.87,66.02 v45.45,66.02 | v20.73,45.59 20.04,45.59 17.96,47.67 17.96,48.36 U2.9
  Bottom 0.15: v20.73,45.59 20.94,45.59 21.28,45.94 25.85,45.94 26.62,46.7 26.62,51.06 25.65,52.03 25.65,52.31 38.87,65.53 44.97,65.53 v45.45,66.02
DN  (via drill 0.3)
  Top 0.15: 165.08,54.9 165.12,54.94 165.12,55.63 164.98,55.77 164.22,55.77 J2.A7 | 165.08,54.9 164.98,54.8 164.22,54.8 J2.B7 | v162.42,53.69 161.38,52.65 146.97,52.65 D1.4 | v165.12,54.87 165.08,54.9
  Bottom 0.15: v162.42,53.69 163.94,53.69 v165.12,54.87
DP
  Top 0.15: J2.A6 164.15,55.35 163.59,55.35 163.38,55.56 163.38,56.05 163.66,56.32 164.15,56.32 J2.B6 164.22,56.32 164.98,56.32 167.12,58.47 167.12,61.04 165.95,62.21 152.79,62.21 146.9,56.32 146.9,54.59 D1.6
EPD_3V3  (via drill 0.3)
  Top 0.3: J1.15 77.44,16.71 77.03,16.71 J1.16 76.96,16.85 76.96,17.2 76.89,17.27 76.89,17.34 77.03,17.47 v77.03,18.03 | 78.59,26.93 78.48,27.03 78.48,27.66 C7.1 | 78.59,26.93 78.76,26.75 79.66,26.75 82.36,24.05 82.22,23.91 82.22,22.81 82.29,22.74 82.29,22.67 81.74,22.11 81.46,22.11 EPD_C5.2 81.32,21.98 81.25,21.91 81.25,20.04 79.87,18.65 v79.59,18.65 | 73.77,27.31 74.51,27.31 75.25,26.56 78.22,26.56 78.59,26.93 | 73.77,27.31 72.77,27.31 Q2.2 | v80.21,15.81 79.38,14.98 79.09,14.98 77.43,13.32 71.77,13.32 68.86,10.41 58.61,10.41 52.17,3.97 51.41,3.97 EPD_3V3.TP | 73.77,27.31 73.77,30.49 77.58,34.3 77.99,34.3 L1.2
  Bottom 0.3: v77.03,18.03 75.51,19.55 75.51,19.97 75.85,20.31 78.14,20.31 79.18,19.27 79.18,19.07 v79.59,18.65 79.66,18.51 80.15,18.03 80.15,15.95 80.21,15.88 v80.21,15.81
EPD_3V3_C  (via drill 0.3)
  Top 0.3: v35.83,53.14 34.58,54.39 29.73,54.39 20.52,63.6 20.52,65.88 U2.18 | v36.59,52.38 36.59,51.75 41.71,46.63 50.71,46.63 v67.61,29.73 | v68.93,28.42 69.55,27.79 R_CL1.1 69.69,27.79 70.13,27.79 71.58,29.25 Q2.1 72.74,29.19 72.74,28.62 73.01,28.35 v73.22,28.35 | v75.58,28.62 75.64,28.56 78.96,28.56 80.63,26.89 82.85,26.89 104.38,5.36 149.4,5.36 TP13.TP
  Bottom 0.3: v36.59,52.38 v35.83,53.14 | v68.93,28.42 v67.61,29.73 | v75.58,28.62 75.3,28.35 v73.22,28.35
EPD_BUSY  (via drill 0.3)
  Top 0.15: v81.39,18.44 80.49,17.54 80.49,16.71 J1.9 | v104.24,42.82 104.24,55.15 76.89,82.5 76.89,95.8 | 76.89,95.8 76.89,98.7 77.72,99.54 82.64,99.54 84.02,98.15 84.58,98.15 EPD_BUSY.TP | v43.37,96.56 40.33,96.56 10.34,66.57 10.34,65.95 U2.26 | 76.89,95.8 v45.45,95.8
  Bottom 0.15: v81.39,18.44 81.88,17.96 82.15,17.96 104.13,39.93 104.13,42.7 v104.24,42.82 | v43.37,96.56 44.14,95.8 v45.45,95.8
EPD_CS  (via drill 0.3)
  Top 0.15: v78.28,18.17 78.97,17.47 78.97,16.71 J1.12 | v77.62,18.83 74.85,18.83 70.17,23.5 69.76,23.5 D6.2 69.69,23.57 69.69,23.91 68.44,25.16 68.44,26.68 68.23,26.89 68.23,27.65 R9.1 68.16,27.52 v65.67,27.52 | v18.03,51.89 20.45,49.47 20.45,48.43 U2.11 20.52,48.36 20.52,47.67 20.94,47.25 24.88,47.25 25.23,47.6 v25.37,47.6 | v6.39,66.71 5.91,66.71 2.24,70.38 EPD_CS.TP | v63.25,29.94 61.66,29.94 46.28,45.31 27.65,45.31 v26.13,46.84
  Bottom 0.15: v78.28,18.17 | v78.28,18.17 v77.62,18.83 | v18.03,51.89 6.81,63.11 6.81,66.3 v6.39,66.71 | v63.25,29.94 v65.67,27.52 | v25.37,47.6 v26.13,46.84
EPD_DC  (via drill 0.3)
  Top 0.15: v79.73,19.27 79.59,19.27 79.11,18.79 79.11,18.51 79.52,18.1 79.52,16.71 J1.11 | v74.81,24.19 70.52,24.19 69.13,25.58 v68.93,25.58 | v67.96,26.55 66.64,26.55 60.13,20.04 60.13,18.79 59.93,18.58 58.82,18.58 46.35,6.12 46.35,3.97 TP11.TP 45.11,3.9 44.41,3.21 40.33,3.21 14.15,29.39 v14.15,44.21 | v14.15,45.66 12.9,46.91 12.9,48.36 U2.5
  Bottom 0.15: v74.81,24.19 v79.73,19.27 | v67.96,26.55 v68.93,25.58 | v14.15,44.21 v14.15,45.66
EPD_RST  (via drill 0.3)
  Top 0.15: v79.24,27.31 79.66,27.31 80.49,26.48 81.32,26.48 83.88,23.91 83.88,21.56 80.01,17.68 80.01,16.71 J1.10 | v66.02,30.56 61.45,30.56 45.8,46.21 32.71,46.21 32.29,46.63 31.53,46.63 TP12.TP 31.53,46.7 31.53,47.74 31.6,47.81 30.77,48.64 v30.77,51.41 | v28.69,53.49 28.21,53.97 27.93,53.97 16.71,65.19 16.71,65.88 U2.21
  Bottom 0.15: v79.24,27.31 79.24,28.22 76.91,30.56 v66.02,30.56 | v30.77,51.41 v28.69,53.49
FLASH_CS  (via drill 0.3)
  Top 0.15: R5.1 38.53,51.27 39.01,51.27 40.47,52.72 40.81,52.72 D9.2 40.4,52.72 v38.8,54.32 | v37.7,55.42 37.7,58.61 38.73,59.65 38.8,59.65 39.22,60.06 39.22,60.27 U1.1 | v35.2,52.93 34.93,52.65 25.23,52.65 21.77,49.19 21.77,48.43 U2.12
  Bottom 0.15: v38.8,54.32 v37.7,55.42 37.49,55.42 35.2,53.14 v35.2,52.93
GDR  (via drill 0.3)
  Top 0.15: R4.2 62.76,17.06 62.76,16.57 62.56,16.37 59.86,16.37 58.89,17.34 Q3.1 58.96,17.41 59.86,18.3 63.59,18.3 66.6,15.3 v74.02,15.3 | v79.9,13.35 79.95,13.29 81.23,13.29 84.02,16.09 84.02,16.64 J1.2
  Bottom 0.15: v79.9,13.35 79.25,12.7 76.62,12.7 v74.02,15.3
GND  (via drill 0.3, 0.35)
  Top 0.15: U2.29_5 13.53,55.7 13.53,56.88 U2.29_6 | v82.02,18.44 80.98,17.41 80.98,16.71 J1.8 | v83.47,19.9 83.88,19.9 85.55,21.56 85.55,22.88 85.27,23.15 84.99,23.15 84.79,23.36 EPD_C1.1 84.72,23.43 84.72,23.71 v83.68,24.75 | v83.05,24.12 83.12,24.05 83.12,23.43 EPD_C2.1 | v77.33,14.01 72.17,14.01 J1.MP2 | v78.24,13.41 78.24,12.83 83.95,12.83 85.13,14.01 85.34,14.01 85.48,14.15 J1.MP1
  Top 0.152: EPD_C11.1 63.66,18.95 64.78,17.83 v64.95,17.83 | U2.29_3 12.27,59.31 v11.57,60.01 | v9.9,61.56 7.8,63.66 U2.28
  Bottom 0.15: v83.47,19.9 v82.02,18.44 | v83.68,24.75 v83.05,24.12 | v78.24,13.41 78.09,13.26 v77.33,14.01
  Bottom 0.152: v11.57,60.01 10.01,61.56 v9.9,61.56
  other vias: 90.41,51.46 97.3,54.03 91.41,56.07 76.69,31.91 74.87,33.45 74.4,36.84 3.94,95.73 78.25,25.45 79.43,24.7 4.19,94.28 27.71,106.58 77.14,25.99 75.98,27.34 61.46,15.18 66.95,15.95 70.55,21.94 38.14,36.94 51.91,103.35 38.27,47.64 40.42,39.67 44.09,49.99 147.48,51.1 145.2,50.25 138.36,55.63 115.43,37 113.11,39.26 135.76,59.43 10.65,101.34 8.97,51.31 11.95,51.31 14.21,52.55 105.14,52.98 140.97,55.42 59.56,13.95 57.81,105.14 119.4,53.98 60.41,103.22 119.95,51.33 166.42,50.44 166.42,60.62 110.36,41.72 116.94,48.55 32.9,32.91 35.86,33.72 40.64,54.36 40.55,56.6 166.97,62.21 162.9,58.72 105.83,41.81 61.05,17.14 60.89,19.2 140.28,12.3 75.81,15.9 55.29,84.75 84.62,82.59 111.1,59.99 107.89,66.1 38.8,77.56 65.39,67.1 58.6,63.2 60.87,59.73 37.06,23.27 50.98,20.78 60.42,41.45 55.49,39.14 151.54,10.26 90,16.01 40.19,98.3 40.39,94.9 30.49,61.36 22.44,70.57 20.35,58.98 21.02,54.49 22.51,51.91 28.74,47.84 13.99,104.94 71.22,26.49 74.4,25.54 68.27,18.1 46.52,29.88 63.1,23.8 90.89,30.38 24.4,62.63 16.78,63.61 21.82,64.51 27.75,51.48 17.5,50.14 16.33,46.36 20.2,42.86 23.16,46.54 34.57,30.37 11.88,46.08 14.12,46.69 2.27,76.03 125.94,4.7 122.49,38.87 113.79,50.66 150.61,34.4
  pour Bottom: 21.15,107.6 21.15,112.62 0.12,112.62 0.08,0.08 1.27,0.08 70.6,1.34 70.6,11.45 70.61,11.47 70.63,11.49 70.66,11.51 88.92,11.51 88.94,11.49 88.96,11.47 88.98,11.45 88.98,1.35 170.08,1.35 170.1,68.5 92.19,68.5 92.16,68.52 92.14,68.54 92.13,68.56 92.13,112.62 69.93,112.95 69.93,107.6 69.91,107.58 69.89,107.56 69.87,107.54 21.21,107.54 21.19,107.56 21.16,107.58
  pour Top: 6.34,48.11 6.32,48.09 6.29,48.08 0.08,48.08 0.08,0.08 1.27,0.08 70.6,1.34 70.6,11.45 70.61,11.47 70.63,11.49 70.66,11.51 88.92,11.51 88.94,11.49 88.96,11.47 88.98,11.45 88.98,1.35 170.08,1.35 170.1,68.5 92.19,68.5 92.16,68.52 92.14,68.54 92.13,68.56 92.13,112.62 69.93,112.95 69.93,107.6 69.91,107.58 69.89,107.56 69.87,107.54 21.21,107.54 21.19,107.56 21.16,107.58 21.15,107.6 21.15,112.62 19.06,112.62 19.06,112.62 19.05,112.62 19.03,112.62 19.03,112.62 0.08,112.95 0.08,66.22 6.29,66.22 6.32,66.21 6.34,66.19 6.35,66.16 6.35,48.14
  pour Bottom: 6.34,48.11 6.32,48.09 6.29,48.08 0.08,48.08 0.08,0.08 1.27,0.08 70.6,1.34 70.6,11.45 70.61,11.47 70.63,11.49 70.66,11.51 88.92,11.51 88.94,11.49 88.96,11.47 88.98,11.45 88.98,1.35 170.08,1.35 170.1,68.5 92.19,68.5 92.16,68.52 92.14,68.54 92.13,68.56 92.13,112.62 69.93,112.95 69.93,107.6 69.91,107.58 69.89,107.56 69.87,107.54 21.21,107.54 21.19,107.56 21.16,107.58 21.15,107.6 21.15,112.62 19.06,112.62 19.06,112.62 19.05,112.62 19.03,112.62 19.03,112.62 0.08,112.95 0.08,66.22 6.29,66.22 6.32,66.21 6.34,66.19 6.35,66.16 6.35,48.14
GPIOB  (via drill 0.3)
  Top 0.15: v21.28,44.21 21.7,43.79 22.11,43.79 R1.1 | v21.28,45.31 21.28,45.66 19.27,47.67 19.27,48.36 U2.10
  Bottom 0.15: v21.28,45.31 v21.28,44.21
INT_RTC  (via drill 0.3)
  Top 0.15: 87.21,66.3 87.21,65.4 R1_PINH1.1 | 87.21,66.3 86.31,67.2 86.31,67.75 86.1,67.96 84.99,67.96 84.79,67.75 84.79,65.19 85.69,64.29 85.69,63.11 U3.3 | v15.88,49.88 16.64,49.12 16.64,48.43 U2.8 | v8.24,64.76 8.13,64.65 8.13,64.63 10.62,62.14 10.62,54.59 14.5,50.71 v15.05,50.71 15.05,50.78 17.89,53.62 v17.89,53.97 | v6.67,67.27 6.67,67.89 1.48,73.08 1.34,73.08 0.65,73.77 0.65,76.06 1.69,77.1 1.69,77.72 2.03,78.07 TP15.TP | 87.21,66.3 88.11,66.3 88.46,66.64 88.46,67.75 87.69,68.51 84.72,68.51 81.46,65.26 45.59,65.26 v45.45,65.4 | v42.96,64.01 27.93,64.01 v24.4,60.48
  Bottom 0.15: v15.05,50.71 v15.88,49.88 | v8.24,64.76 8.24,65.7 v6.67,67.27 | v45.45,65.4 45.31,65.26 44.21,65.26 v42.96,64.01 | v17.89,53.97 v24.4,60.48
IO/BOOT  (via drill 0.3)
  Top 0.15: C6.1 53.35,105.21 52.86,105.21 51.41,106.67 50.85,106.67 BOOT_BUTTON.3 50.78,106.74 47.32,106.74 BOOT_BUTTON.4 47.25,106.74 46.7,106.74 46.21,106.25 46.21,106.05 46.08,105.91 46.08,105.7 46.14,105.63 45.66,105.14 45.38,105.14 R_BOOT.1 45.45,105.08 v45.45,100.58 | v44.34,96.28 24.33,76.27 24.33,65.95 U2.15
  Bottom 0.15: v44.34,96.28 43.86,96.77 43.86,98.5 45.45,100.09 v45.45,100.58
IO/CHANGE  (via drill 0.3)
  Top 0.15: C10.1 67.61,105.14 67.61,105.42 67.27,105.77 67.13,105.77 66.92,105.98 66.92,106.18 66.43,106.67 65.88,106.67 CHANGE_BUTTON.3 65.81,106.74 62.42,106.74 CHANGE_BUTTON.4 62.35,106.67 61.73,106.67 61.17,106.11 61.17,105.35 60.83,105.01 R_CHANGE.1 60.27,104.94 60.2,104.87 59.72,104.87 51.75,96.9 v45.45,96.9 | v44.34,96.9 14.15,66.71 14.15,65.95 U2.23
  Bottom 0.15: v45.45,96.9 v44.34,96.9
MISO  (via drill 0.3)
  Top 0.15: v35.9,31.05 36.66,30.29 37.42,30.29 R8.1 | v34.79,32.16 32.5,34.44 32.5,34.58 32.09,35 31.74,35 D12.2 31.67,35.06 31.67,40.47 v25.71,46.42 | v8.2,67.47 9.03,66.64 9.03,65.95 U2.27 9.1,65.88 9.1,65.19 18.65,55.63 v18.65,53.49 | v7.5,68.16 2.45,73.22 2.45,73.84 2.03,74.26 MISO.TP 2.03,74.33 2.03,74.95 3.42,76.34 3.42,94.34 4.66,95.59 5.77,95.59 J4.P7
  Bottom 0.15: v34.79,32.16 v35.9,31.05 | v7.5,68.16 v8.2,67.47 | v18.65,53.49 v25.71,46.42
MOSI  (via drill 0.3)
  Top 0.15: v78,15.88 78,16.64 J1.14 | v64.29,29.59 63.53,29.59 63.39,29.45 61.45,29.45 59.86,31.05 58.68,31.05 MOSI.TP 58.61,31.05 40.88,31.05 39.5,32.43 39.36,32.43 39.29,32.36 38.46,32.36 38.25,32.57 38.18,32.57 | v66.36,31.74 47.11,50.99 47.11,56.46 U1.5 | v38.25,31.05 38.11,30.91 38.11,30.84 38.53,30.42 38.87,30.42 R7.1 38.73,30.36 38.73,29.87 38.39,29.52 31.25,29.52 16.85,43.93 v16.85,44.21 | 38.18,32.57 38.18,34.23 37.63,34.79 37.21,34.79 D11.2 | 38.18,32.57 v38.18,32.29 | v15.4,45.66 15.4,48.36 U2.7 15.4,48.43 15.4,50.02 17.89,52.52 v18.1,52.52 | v6.95,90.88 6.67,91.16 5.84,91.16 J4.P3 | v7.92,89.91 8.33,89.49 v8.33,69
  Bottom 0.15: v78,15.88 v64.29,29.59 64.29,29.66 v66.36,31.74 | v38.25,31.05 38.25,32.23 v38.18,32.29 | v16.85,44.21 v15.4,45.66 | v7.92,89.91 v6.95,90.88 | v8.33,69 8.33,68.79 17.13,59.99 17.13,53.49 v18.1,52.52
N$1  (via drill 0.3)
  Top 0.15: v147.53,47.6 147.66,47.46 147.66,47.25 147.25,46.84 146.97,46.84 R2-USB.1 | v153.07,53.14 156.38,53.14 162.82,59.58 163.38,59.58 163.72,59.25 165.52,59.25 165.95,58.82 165.95,58.05 165.19,57.29 164.22,57.29 J2.B5
  Bottom 0.15: v153.07,53.14 v147.53,47.6
N$2  (via drill 0.3)
  Top 0.15: v146.21,47.6 145.66,48.15 145.66,48.36 R2-USB1.2 | v152.37,42.13 159.23,42.13 167.13,50.03 167.13,52.16 164.98,54.32 164.22,54.32 J2.A5
  Bottom 0.15: v146.21,47.6 146.9,47.6 v152.37,42.13
N$3
  Top 0.15: C1_BAT1.1 106.53,39.06 106.53,40.19 106.83,40.49 D2.1 107.31,40.54 110.69,40.54 111.03,40.88 111.52,40.88 111.58,40.95 IC4.3 111.66,41.02 112.21,41.02 112.55,41.37 112.55,42.47 112.21,42.82 111.66,42.82 IC4.1
N$4  (via drill 0.3)
  Top 0.15: v115.67,49.05 111.58,49.05 111.31,49.33 111.31,49.75 R1_BAT.2 | v117.12,50.16 117.4,49.88 118.09,49.88 U5.1
  Bottom 0.15: v115.67,49.05 116.02,49.05 v117.12,50.16
N$6
  Top 0.15: R2_BAT.2 115.33,46.91 115.81,46.91 116.16,47.25 116.16,49.19 115.53,49.81 U5.5
N$7
  Top 0.15: 84.99,32.23 85.62,32.23 87.35,33.96 93.3,33.96 93.51,33.75 93.51,32.29 93.16,31.95 92.75,31.95 C4.1 | 84.99,32.23 84.92,32.16 D4.1 84.99,32.23 | 84.99,32.23 84.37,32.85 84.09,32.85 79.73,37.21 79.73,37.42 D3.2
N$9
  Top 0.15: R1_BAT.1 112.28,49.81 112.28,50.23 111.72,50.78 111.45,50.78 111.1,51.13 111.1,51.48 CHG_LED.C
N$11
  Top 0.15: J1.4 82.98,16.71 82.98,20.04 84.72,21.77 84.72,22.04 EPD_C1.2
N$12  (via drill 0.3)
  Top 0.15: v82.5,19.55 82.5,16.71 J1.5 | v81.88,20.18 81.88,20.52 83.12,21.77 83.12,22.04 EPD_C2.2
  Bottom 0.15: v81.88,20.18 v82.5,19.55
N$14
  Top 0.15: J1.18 76.08,16.78 76.08,18.51 77.31,18.51 77.51,18.3 77.79,18.3 79.45,19.97 79.45,21.84 79.66,22.04 EPD_C6.2
N$15  (via drill 0.3)
  Top 0.15: v75.63,17.51 75.63,16.83 J1.19 | v78.97,20.66 78.97,20.87 78,21.84 78,22.11 EPD_C7.2
  Bottom 0.15: v75.63,17.51 75.63,16.9 77.41,15.12 80.15,15.12 80.7,15.67 80.7,15.95 80.56,16.09 80.56,19.07 v78.97,20.66
N$16  (via drill 0.3)
  Top 0.15: v49.61,100.16 49.4,99.95 48.78,99.95 IC1.5 | v50.3,99.33 50.3,98.7 50.71,98.29 51.06,98.29 51.2,98.15 C_DELAY.1
  Bottom 0.15: v49.61,100.16 49.61,100.02 v50.3,99.33
N$17  (via drill 0.3)
  Top 0.15: v77.44,15.71 77.16,15.44 75.53,15.44 75.02,15.95 75.02,16.64 J1.20 | v78.04,19.66 78.04,20.13 76.41,21.76 EPD_C8.2
  Bottom 0.15: v77.44,15.71 77.75,15.4 79.38,15.4 79.73,15.74 79.73,17.89 78.04,19.58 v78.04,19.66
N$19  (via drill 0.3)
  Top 0.15: v79.24,15.88 78.76,15.4 78.55,15.4 78.03,14.88 75.06,14.88 73.98,15.96 73.98,16.64 J1.22 | v76.06,19.76 75.97,19.76 75.93,19.8 75.4,19.8 73.43,21.77 73.43,21.91 EPD_C10.2
  Bottom 0.15: v79.24,15.88 79.24,17.82 77.16,19.9 76.2,19.9 v76.06,19.76
N$21
  Top 0.15: EPD_C12.2 62.06,20.67 63.04,19.69 64.17,19.69 67.15,16.71 72.94,16.71 J1.24
N$22
  Top 0.15: R_CAPACITOR.1 90.67,54.66 90.67,55.08 83.82,61.93 83.82,67.2 84.85,68.23 86.24,68.23 87.28,67.2 87.62,67.2 D7.1
PREVGH  (via drill 0.3)
  Top 0.15: v78.62,15.88 77.9,15.16 75.18,15.16 74.47,15.87 74.47,16.64 J1.21 | v76.55,19.27 76.55,20.18 74.95,21.77 74.95,21.83 EPD_C9.2 75.71,23.16 75.71,23.75 78.16,26.2 v79.04,26.2 | v80.56,27.72 80.77,27.93 84.92,27.93 D5.1
  Bottom 0.15: v78.62,15.88 78.62,17.2 v76.55,19.27 | v79.04,26.2 v80.56,27.72
PREVGL  (via drill 0.3)
  Top 0.15: 73.33,17.51 70.59,20.24 63.78,20.24 EPD_C11.2 | 73.33,17.51 73.5,17.34 73.5,16.71 J1.23 | v87.49,28.42 88.39,29.32 88.39,32.09 D4.2 | v73.29,17.47 73.33,17.51
  Bottom 0.15: v87.49,28.42 87.49,26.41 80.91,19.83 80.91,16.16 80.98,16.09 80.98,15.54 78.41,12.97 77.5,12.97 73.29,17.18 v73.29,17.47
RESE  (via drill 0.3)
  Top 0.15: 63.46,14.98 63.46,17.54 63.25,17.75 60.76,17.75 60.34,17.34 60.2,17.34 Q3.2 | 63.46,14.98 63.46,12.49 62.42,11.45 62,11.45 R3.2 | v79.1,14.28 81.72,14.28 83.47,16.02 83.47,16.64 J1.3 | v77.83,14.45 72.85,14.45 72.32,14.98 63.46,14.98
  Bottom 0.15: v79.1,14.28 78,14.28 v77.83,14.45
RESE'
  Top 0.15: R3.1 61.93,12.42 61.86,12.49 61.45,12.49 61.24,12.7 61.24,12.76 61.1,12.91 R2.2 60.48,13.02 60.48,13.95 59.64,14.79 59.45,14.79 58.68,14.02 58.68,11.73 58.75,11.66 SJ1.2
RESET  (via drill 0.3)
  Top 0.15: R_RESET.1 20.87,105.14 20.87,105.35 21.49,105.98 21.49,106.11 22.04,106.67 22.53,106.67 RESET_BUTTON.4 22.6,106.74 26.06,106.74 RESET_BUTTON.3 26.13,106.67 26.68,106.67 28.21,105.14 29.11,105.14 C5.1 29.18,105.08 29.25,105.01 29.73,105.01 32.09,102.65 v42.54,102.65 | v44.97,100.23 45.24,99.95 45.87,99.95 IC1.1 | v43.37,101.61 41.64,101.61 6.88,66.85 6.88,62 10.34,58.54 10.34,48.43 U2.3
  Bottom 0.15: v42.54,102.65 43.48,101.72 | 43.48,101.72 v44.97,100.23 | 43.48,101.72 v43.37,101.61
RTC_RST  (via drill 0.3)
  Top 0.15: v44.34,64.77 23.5,64.77 23.08,65.19 23.08,65.88 U2.16 | v83.33,64.77 v45.45,64.77 | v84.3,64.5 84.51,64.29 84.51,63.11 U3.4
  Bottom 0.15: v45.45,64.77 v44.34,64.77 | v83.33,64.77 84.02,64.77 v84.3,64.5
RX  (via drill 0.3)
  Top 0.15: v19.27,62 16.09,62 12.9,65.19 12.9,65.88 U2.24 | v21.07,63.8 27.31,63.8 28,64.5 43.1,64.5 v44.34,63.25 | v49.68,57.92 73.43,57.92 v85.69,45.66 | v86.45,44.9 97.44,44.9 104.58,37.77 v146.63,37.77 | v147.8,38.94 163.31,38.94 165.67,41.3 RX.TP
  Bottom 0.15: v21.07,63.8 v19.27,62 | v49.68,57.92 v44.34,63.25 | v86.45,44.9 v85.69,45.66 | v147.8,38.94 v146.63,37.77
SCK  (via drill 0.3)
  Top 0.15: D10.2 12.42,100.71 12.28,100.85 9.3,100.85 R6.1 9.23,100.78 9.23,100.58 7.43,98.77 7.43,89.01 6.67,88.25 | 6.67,88.25 4.94,88.25 4.53,88.66 4.53,92.89 5.01,93.37 5.77,93.37 J4.P5 | v77.58,17.47 78.34,17.47 78.48,17.34 78.48,16.71 J1.13 | v68.93,29.66 68.93,35.83 47.11,57.64 47.11,57.78 U1.6 47.04,57.64 45.17,55.77 41.3,55.77 41.23,55.84 v38.8,55.84 | 18.17,53 34.03,53 v34.16,53.14 | 18.17,53 17.96,53 14.15,49.19 14.15,48.43 U2.6 | v149.19,37.56 166.78,37.56 SCK.TP | v148.01,36.38 98.43,36.38 89.22,27.17 83.12,27.17 82.85,27.45 v81.11,27.45 | 6.67,88.25 6.67,69.83 v7.92,68.58 | v8.87,64.78 8.87,64.31 18.38,54.8 18.38,53.83 18.17,53.62 18.17,53
  Bottom 0.15: v77.58,17.47 77.51,17.54 76.89,17.54 72.22,22.22 | 72.22,22.22 69.41,25.02 69.41,29.18 v68.93,29.66 | v34.16,53.14 34.37,53.14 34.44,53.07 34.72,53.07 37.56,55.91 38.73,55.91 v38.8,55.84 | v148.01,36.38 v149.19,37.56 | v81.11,27.45 78.57,24.91 74.9,24.91 72.22,22.22 | v7.92,68.58 7.92,68.37 8.87,67.43 v8.87,64.78
SCL  (via drill 0.3)
  Top 0.15: SENSOR2.4 142.19,14.15 142.19,13.46 142.96,12.7 142.96,10.62 142.06,9.72 142.06,7.78 R2-PINH.1 142.12,7.71 142.12,7.57 142.54,7.16 142.82,7.16 142.89,7.22 143.99,7.22 144.06,7.16 155.56,7.16 166.64,18.24 166.64,21.21 166.02,21.84 165.25,21.84 J3.4 165.19,21.91 165.05,22.04 164.08,22.04 147.04,39.08 143.16,39.08 142.4,39.84 142.4,39.91 v134.85,47.46 | U4.7 127.44,54.25 127.65,54.25 127.79,54.11 127.86,54.11 128,54.25 128.07,54.25 v134.09,48.22 134.16,48.22 134.58,48.64 134.58,48.98 120.31,63.25 v97.46,63.25 | v33.68,53.49 29.66,53.49 17.96,65.19 17.96,65.88 U2.20 | v46.08,60.89 81.67,60.89 88.25,54.32 88.25,53.83 U3.16 88.32,54.32 88.52,54.32 v89.63,55.42
  Bottom 0.15: v134.85,47.46 v134.09,48.22 | v33.68,53.49 33.89,53.49 41.3,60.89 v46.08,60.89 | v89.63,55.42 v97.46,63.25
SDA  (via drill 0.3)
  Top 0.15: v34.58,53.55 34.16,53.97 29.59,53.97 19.21,64.36 19.21,65.88 U2.19 | v45.38,57.22 46.56,58.4 82.85,58.4 86.34,54.9 | 86.34,54.9 86.93,54.32 86.93,53.83 U3.15 | 143.37,14.15 143.37,7.85 R1_PINH.1 | 143.37,14.15 142.47,15.05 141.57,15.05 141.36,14.84 141.36,14.22 SENSOR2.3 | v134.09,48.85 128.21,54.73 127.44,54.73 U4.8 127.51,54.8 126.89,55.42 v105.28,55.42 | v134.37,47.11 134.51,47.11 142.82,38.8 146.9,38.8 164.15,21.56 164.15,21.21 164.35,21.01 165.12,21.01 165.19,20.94 J3.3 165.25,20.87 166.02,20.87 166.36,20.52 166.36,18.38 162.14,14.15 143.37,14.15 | 86.34,54.9 86.59,55.15 v86.79,55.15
  Bottom 0.15: v34.58,53.55 34.79,53.55 38.46,57.22 v45.38,57.22 | v134.09,48.85 133.61,48.36 133.61,47.88 v134.37,47.11 | v86.79,55.15 89.29,55.15 89.49,54.94 104.8,54.94 v105.28,55.42
SRC  (via drill 0.3)
  Top 0.15: C4.2 92.68,33.19 92.13,33.19 88.87,29.94 88.87,28.28 88.52,27.93 D5.2 88.46,27.93 86.45,27.93 84.85,29.52 78.34,29.52 78.09,29.78 L1.1 78.05,29.82 77.79,30.08 v74.33,30.08 | v66.02,28.48 59.58,22.04 59.58,19.55 Q3.3
  Bottom 0.15: v66.02,28.48 66.02,28.76 67.47,30.22 74.19,30.22 v74.33,30.08
SS_SD  (via drill 0.3)
  Top 0.15: v33.06,31.05 32.36,30.36 31.88,30.36 R10.1 31.74,30.29 31.39,30.29 v17.47,44.21 | v34.79,32.78 34.79,33.89 36.59,35.69 37.9,35.69 38.73,34.86 39.08,34.86 D8.2 | v16.37,45.31 16.23,45.17 14.01,45.17 11.66,47.53 11.66,48.36 U2.4 | v6.95,89.15 6.95,89.42 6.88,89.49 6.88,89.7 6.53,90.05 6.26,90.05 J4.P2
  Bottom 0.15: v34.79,32.78 v33.06,31.05 | v17.47,44.21 v16.37,45.31 16.37,45.38 18.58,47.6 18.58,52.65 17.41,53.83 17.41,60.55 6.95,71 v6.95,89.15
TX  (via drill 0.3)
  Top 0.15: v28.07,53.49 23.36,53.49 11.66,65.19 11.66,65.88 U2.25 | v71.14,11.93 97.25,11.93 105.14,4.04 151.82,4.04 152.72,4.94 153.41,4.94 153.76,5.29 TX.TP
  Bottom 0.15: v28.07,53.49 69.62,11.93 v71.14,11.93
USB_D+  (via drill 0.3)
  Top 0.15: v92.68,68.03 134.92,68.03 144.41,58.54 144.41,54.59 D1.1 | v91.71,67.06 90.39,67.06 88.11,69.34 50.65,69.34 v47.6,66.3 | v26.13,52.17 26.13,50.92 24.33,49.12 24.33,48.43 U2.14
  Bottom 0.15: v91.71,67.06 v92.68,68.03 | v47.6,66.3 45.04,63.73 43.3,63.73 33.54,53.97 27.93,53.97 v26.13,52.17
USB_D-  (via drill 0.3)
  Top 0.15: v140.67,56.53 140.83,56.53 142.26,55.1 142.26,54.11 143.72,52.65 144.41,52.65 D1.3 | v139.56,57.64 126.34,57.64 116.43,67.54 v93.16,67.54 | v92.19,66.57 90.46,66.57 87.97,69.07 50.99,69.07 47.74,65.81 46.49,65.81 45.66,66.64 v45.45,66.64 | v25.16,51.96 25.16,51.2 23.08,49.12 23.08,48.43 U2.13
  Bottom 0.15: v139.56,57.64 v140.67,56.53 | v92.19,66.57 v93.16,67.54 | v45.45,66.64 44.62,65.81 38.73,65.81 25.16,52.24 v25.16,51.96
VBAT
  Top 0.3: U4.2 125.44,54.18 125.44,53.69 U4.3 125.3,53.69 125.23,53.69 125.16,53.62 124.81,53.62 124.74,53.69 124.53,53.69 | 124.53,53.69 121.83,53.69 121.42,53.28 120.86,53.28 C2_BAT.1 120.66,53.28 120.17,53.28 119.89,53 119.89,52.65 118.99,51.75 118.16,51.75 U5.3 118.02,51.75 117.33,51.75 116.22,52.86 107.08,52.86 91.64,68.3 91.64,84.02 78.28,97.39 78.28,98.15 VBAT.TP | 124.53,53.69 124.53,52.86 125.02,52.38 125.02,48.22 Q1.3
VBUS
  Top 0.3: 106.13,42.49 | 106.13,42.49 106.18,42.54 107.12,42.54 D2.2 106.81,46.1 106.81,50.3 107.29,50.78 107.29,51.27 C1_BAT.1 107.36,51.41 109.58,51.41 110.55,52.38 112.21,52.38 112.49,52.1 112.49,51.62 CHG_LED.A 112.62,51.55 114.49,51.55 114.7,51.75 U5.4 115.67,51.75 115.81,51.62 115.81,51.34 116.57,50.58 116.57,49.95 120.45,46.08 124.05,46.08 Q1.1 124.19,46.14 124.6,46.14 126.13,47.67 134.3,47.67 140.22,53.59 | 106.13,42.49 R1_PWRUSB.2 | 145.17,51.89 143.65,51.89 142.4,53.14 141.74,53.14 C4_USB.1 140.8,53.14 140.67,53.14 140.22,53.59 | 145.17,51.89 145.86,52.58 145.86,53.35 146.14,53.62 146.9,53.62 D1.5 147.04,53.55 147.66,53.55 149.88,55.77 149.88,56.46 C5_USB.1 | 140.22,53.59 140.12,53.69 140.12,60.13 134.92,65.33 134.92,66.09 TP14.TP | PFMF.050.1.2 148.08,41.78 148.08,48.91 145.24,51.75 145.17,51.89
VRTC
  Top 0.3: C10_SUPERCAP.1 92.68,53.35 90.74,53.35 R_CAPACITOR.2 90.6,53.35 89.7,53.35 88.66,52.31 86.1,52.31 85.96,52.24 | 85.96,52.24 85.96,50.71 C8.1 | 85.96,52.24 85.75,52.45 85.75,53.76 U3.14
VUSB
  Top 0.3: J2.A4 164.22,53 164.22,53.28 J2.B9 164.08,53.21 163.31,53.21 163,53.52 | J2.A9 164.22,58.05 164.22,57.85 J2.B4 164.08,57.92 163.38,57.92 162.97,57.5 162.97,53.55 163,53.52 | 163,53.52 148.98,39.5 145.93,39.5 143.72,41.71 143.58,41.71 PFMF.050.1.1